# EAGLE board tb-light-001 (EAGLE 7.1.0)
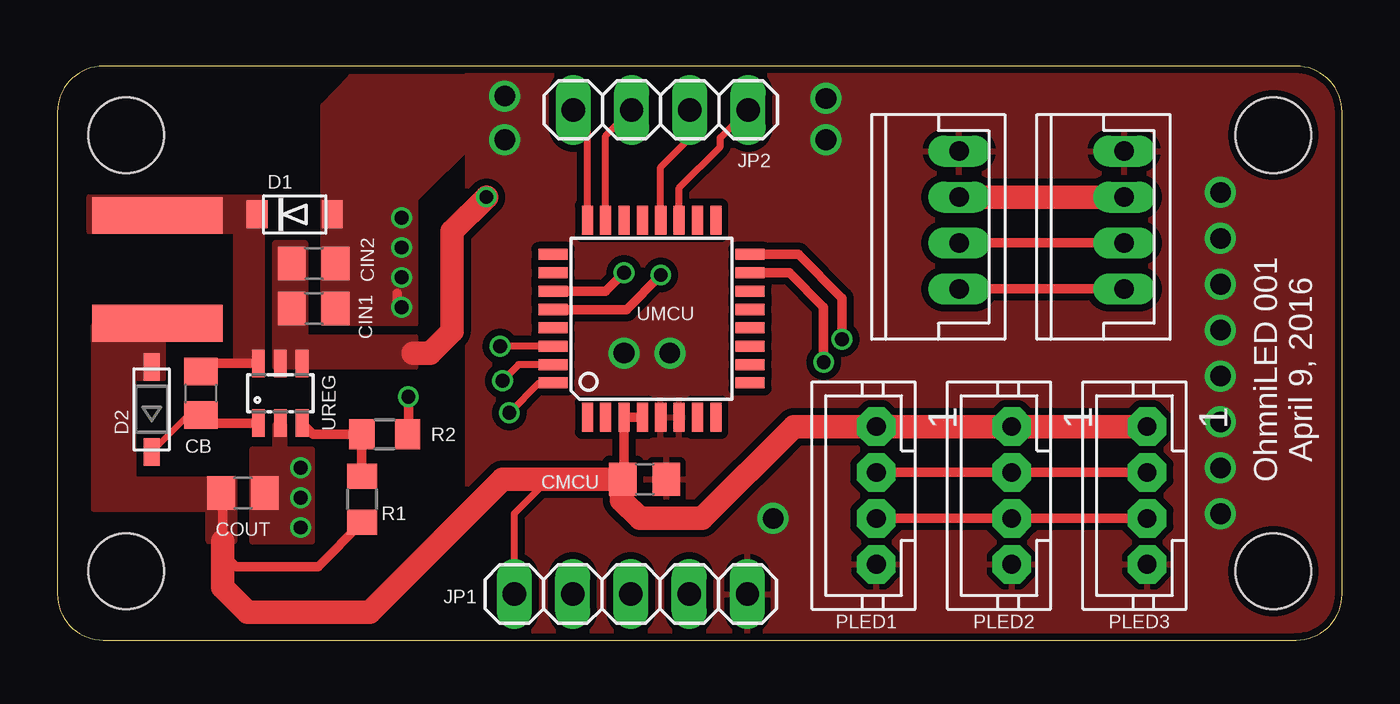
[diagram p0: board, top side]
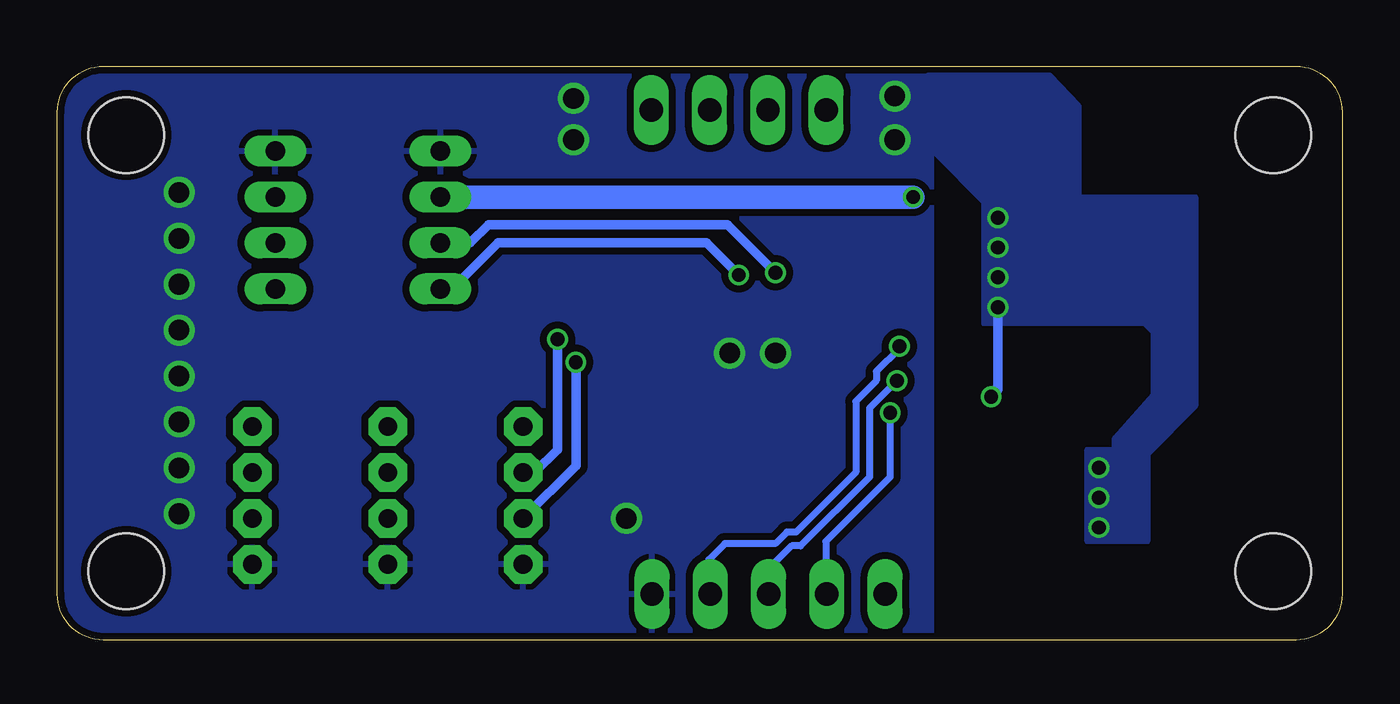
[diagram p1: board, bottom side, seen from below]

Size 56 x 25 mm. Coordinates in mm from the lower left corner, seen from the top.
Outline: 54,25 2,25 arc90 0,23 0,2 arc90 2,0 54,0 arc90 56,2 56,23 arc90 54,25
Copper layers (1*16): Top 0.035mm / dielectric 1.5mm / Bottom 0.035mm
Design rules "dirt_cheap_dirty_boards.v1": minimum track width 5mil, minimum drill 12mil, track to track 5mil, track to pad 5mil, pad to pad 5mil, via to via 5mil, smd to smd 0mil, copper to edge 10mil, drill to drill 10mil, minimum pad ring 10mil, minimum via ring 6mil, stop-mask expansion 2mil, vias tented up to drill 25mil, thermal gap 10mil
Holes 3.3 mm at 3,3 3,22 53,22 53,3

## Footprints (pad centres in the part's own frame; a part is rotated, then mirrored left to right if it is on the bottom)
C0805 = smd 1.2 x 1.45: 1 -0.95,0; 2 0.95,0
SOD-123FL = smd 0.91 x 1.22: A 1.637,0; C -1.637,0
SOD-123 = smd 1.2 x 0.7: A 1.85,0; C -1.85,0
1X05 = drill 1.016 long: 1 -5.08,0; 2 -2.54,0; 3 0,0; 4 2.54,0; 5 5.08,0
1X04 = drill 1.016 long: 1 -3.81,0; 2 -1.27,0; 3 1.27,0; 4 3.81,0
L_NR6028 = smd 1.6 x 5.7: P$1 -2.35,0; P$2 2.35,0
JST-PH4 = drill 0.813 pad 1.676 octagon: 1 3,0; 2 1,0; 3 -1,0; 4 -3,0
R0805 = smd 1.1 x 1.3: 1 -1,0; 2 1,0
TE-AMP-4PIN = drill 0.85 long: 1 -3.3,0.9; 2 -1.3,0.9; 3 0.7,0.9; 4 2.7,0.9
TQFP32-08 = smd 1.27 x 0.483: 1 -4.293,2.8; 2 -4.293,2; 3 -4.293,1.2; 4 -4.293,0.4; 5 -4.293,-0.4; 6 -4.293,-1.2; 7 -4.293,-2; 8 -4.293,-2.8; 17 4.293,-2.8; 18 4.293,-2; 19 4.293,-1.2; 20 4.293,-0.4; 21 4.293,0.4; 22 4.293,1.2; 23 4.293,2; 24 4.293,2.8 | smd 0.483 x 1.27: 9 -2.8,-4.293; 10 -2,-4.293; 11 -1.2,-4.293; 12 -0.4,-4.293; 13 0.4,-4.293; 14 1.2,-4.293; 15 2,-4.293; 16 2.8,-4.293; 25 2.8,4.293; 26 2,4.293; 27 1.2,4.293; 28 0.4,4.293; 29 -0.4,4.293; 30 -1.2,4.293; 31 -2,4.293; 32 -2.8,4.293
SOT23-6 = smd 0.55 x 1.2: 1 -0.95,-1.3; 2 0,-1.3; 3 0.95,-1.3; 4 0.95,1.3; 5 0,1.3; 6 -0.95,1.3

## Placement (x,y rotation side)
CB  10nF  [C0805]  6.26,10.75 90 top
CIN1  10uF  [C0805]  11.18,14.44 0 top
CIN2  10uF  [C0805]  11.18,16.4 0 top
CMCU  10uF  [C0805]  25.6,7 0 top
COUT  22uF  [C0805]  8.09,6.4 0 top
D1  [SOD-123FL]  10.35,18.54 0 top
D2  SMALL-SIGNALSOD-123  [SOD-123]  4.11,10.05 90 top
JP1  [1X05]  25,2 0 top
JP2  [1X04]  26.3,23.1 0 top
L1  4.7uH  [L_NR6028]  4.36,16.15 270 top
PLED1  [JST-PH4]  35.7,6.3 90 top
PLED2  [JST-PH4]  41.6,6.3 90 top
PLED3  [JST-PH4]  47.5,6.3 90 top
R1  49.9k  [R0805]  13.29,6.13 270 top
R2  9.53k  [R0805]  14.27,8.97 180 top
U$1  [LOGO-HORIZ-SMALL]  25.25,12.6 0 bottom
U$3  SERVO-CONNVERT  [TE-AMP-4PIN]  38.4,18 270 top
U$4  SERVO-CONNVERT  [TE-AMP-4PIN]  45.6,18 270 top
UMCU  KE02  [TQFP32-08]  25.9,14 90 top
UREG  AP3211  [SOT23-6]  9.72,10.75 0 top

## Library data of the parts
CB = jared-common-parts; DIGIKEY#: 1276-1015-1-ND
CIN1 CIN2 CMCU = jared-common-parts; DIGIKEY#: 490-5523-1-ND
COUT = jared-common-parts; DIGIKEY#: 490-10511-1-ND
D1 = jared-common-diodes; DIGIKEY#: DB2X41500LCT-ND
D2 = jared-common-diodes; DIGIKEY#: 1N4148W-FDICT-ND
JP1 = pinhead; DIGIKEY#: MANUAL_PLACE
JP2 = pinhead; DIGIKEY#: DNP
L1 = jared-common-parts; DIGIKEY#: 587-2100-1-ND
PLED1-PLED3 = jst-ph; DIGIKEY#: 455-1706-ND
R1 = jared-common-parts; DIGIKEY#: 311-49.9KCRCT-ND
R2 = jared-common-parts; DIGIKEY#: 311-9.53KCRCT-ND
U$1 = jared-common-parts
U$3 U$4 = jared-common-conns; DIGIKEY#: A98779-ND
UMCU = jared-mcu; DIGIKEY#: MKE02Z32VLC4-ND
UREG = jared-common-reg; DIGIKEY#: AP3211KTR-G1DICT-ND

## Nets
5V: CMCU.1 COUT.1 D2.A JP1.1 L1.P$2 PLED1.1 PLED2.1 PLED3.1 R1.2 UMCU.3 UMCU.4
AUX_ADC1: JP2.4 UMCU.19
AUX_ADC2: JP2.3 UMCU.20
AUX_UART_RX: JP2.1 UMCU.24
AUX_UART_TX: JP2.2 UMCU.23
GND: CIN1.2 CIN2.2 CMCU.2 COUT.2 D1.A JP1.5 PLED1.4 PLED2.4 PLED3.4 R2.1 U$3.1 U$4.1 UMCU.5 UMCU.6 UREG.2
LED_CLOCK: PLED1.2 PLED2.2 PLED3.2 UMCU.16
LED_DATA: PLED1.3 PLED2.3 PLED3.3 UMCU.15
N$1: R1.1 R2.2 UREG.3
N$2: CB.2 D1.C L1.P$1 UREG.6
N$3: CB.1 D2.C UREG.1
REG_IN: CIN1.1 CIN2.1 U$3.2 U$4.2 UREG.4 UREG.5
SWD_CLK: JP1.4 UMCU.30
SWD_DIO: JP1.2 UMCU.32
SWD_RESET: JP1.3 UMCU.31
UART_MCU_RX: U$3.4 U$4.4 UMCU.28
UART_MCU_TX: U$3.3 U$4.3 UMCU.27

## Tracks (layer width: path | path; a pad name or v marks a point on that pad's centre or on a via)
5V
  Top 0.305: JP1.1 19.92,5.52 21.4,7
  Top 0.406: R1.2 11.36,3.2 7.8,3.2 7.2,3.8 7.2,4.3 7.2,6.34 COUT.1 | CMCU.1 24.7,7.45 UMCU.3 UMCU.4
  Top 1.016: PLED3.1 PLED2.1 PLED1.1 32.1,9.3 28.1,5.3 25.4,5.3 24.6,6.1 24.6,6.95 CMCU.1 21.4,7 19.4,7 13.6,1.2 8.3,1.2 7.2,2.3 7.2,4.3
  pour Top (no thermals): 4.6,13.7 4.6,11.4 3.3,11.4 3.3,7 7.7,7 7.7,4.3 6.6,4.3 6.6,5.7 1.6,5.7 1.6,13.7
AUX_ADC1
  Top 0.305: UMCU.19 27.1,19.7 28.9,21.5 28.9,21.89 JP2.4
AUX_ADC2
  Top 0.305: UMCU.20 26.3,20.6 27.6,21.9 27.6,23.07 JP2.3
AUX_UART_RX
  Top 0.305: UMCU.24 23.1,22.49 JP2.1
AUX_UART_TX
  Top 0.305: UMCU.23 23.9,21.97 JP2.2
GND  (via drill 0.6, 0.9)
  Top 0.406: R2.1 15.3,9 v15.3,10.6 | v15,14.5 14.8,14.7 14.8,15.1
  Bottom 0.406: v15.3,10.6 15,10.9 v15,14.5
  other vias: 15,15.8 15,17.1 10.6,4.9 10.6,6.2 10.6,7.5 15,18.4 33.5,23.6 33.5,21.8 19.5,23.7 19.5,21.8 50.7,19.5 50.7,17.5 50.7,15.5 50.7,13.5 50.7,11.5 50.7,9.5 50.7,7.5 50.7,5.5 26.7,12.5 24.7,12.5 31.2,5.3
  pour Top (no thermals): 15.6,13.8 11.6,13.8 11.6,19.3 15.6,19.3
  pour Bottom (no thermals): 15.6,13.8 15.6,19.3 6.4,19.3 6.4,10.2 8.5,8.1 8.5,4.3 11.1,4.3 11.1,8.3 9.9,8.3 9.9,8.8 8.2,10.7 8.2,13.4 8.6,13.8
  pour Top (no thermals): 11.1,4.3 11.1,8.3 9.9,8.3 9.9,9.4 9.5,9.4 9.5,8.3 8.5,8.3 8.5,4.3
  pour Top (isolate 0.305): 17.9,26.7 56.7,26.7 56.7,-1.1 17.9,-1.1
  pour Bottom (isolate 0.305): 17.9,27.8 56.9,27.9 56.9,-3 17.9,-3.1
  pour Top (no thermals): 11.6,19.2 11.6,23.3 12.8,24.55 18.2,24.55 18.2,21.8 15.6,19.2
  pour Bottom (no thermals): 11.5,23.3 11.5,18.8 15.3,18.8 18,21.5 18.05,24.6 12.75,24.6
LED_CLOCK  (via drill 0.6)
  Top 0.406: PLED3.2 PLED2.2 PLED1.2 | v34.2,13.1 34.2,14.9 32.3,16.8 UMCU.16
  Bottom 0.406: PLED1.2 35.2,7.3 34.2,8.3 v34.2,13.1
LED_DATA  (via drill 0.6)
  Top 0.406: PLED1.3 PLED2.3 PLED3.3 | v33.4,12.1 33.4,14.5 31.9,16 UMCU.15
  Bottom 0.406: PLED1.3 33.4,7.6 v33.4,12.1
N$1
  Top 0.406: R1.1 13.27,7.55 R2.2 11.15,8.97 UREG.3
N$2
  Top 0.406: UREG.6 6.26,12.05 CB.2
  pour Top (no thermals): 1.4,19.3 8.9,19.3 8.9,12 7.8,12 7.8,17.8 1.4,17.8
N$3
  Top 0.254: D2.C 5.71,9.8 CB.1
  Top 0.406: CB.1 6.61,9.45 UREG.1
REG_IN  (via drill 0.6)
  Top 1.016: U$4.2 U$3.2 | v18.7,19.3 17.2,17.8 17.2,13.45 16.25,12.5 15.5,12.5
  Bottom 1.016: U$3.2 v18.7,19.3
  pour Top (no thermals): 9.5,17.3 10.8,17.3 10.8,13.2 15.6,13.2 15.6,11.9 9.5,11.9
SWD_CLK  (via drill 0.6)
  Top 0.305: UMCU.30 v19.3,12.8
  Bottom 0.305: v19.3,12.8 19.3,12.7 20.3,11.7 20.3,11.3 21.2,10.4 21.2,7.3 23.8,4.7 24.2,4.7 24.7,4.2 26.9,4.2 27.6,3.5 27.6,2.06 JP1.4
SWD_DIO  (via drill 0.6)
  Top 0.305: UMCU.32 21,11.2 v19.7,9.9
  Bottom 0.305: v19.7,9.9 19.7,7.1 22.5,4.3 22.5,2.04 JP1.2
SWD_RESET  (via drill 0.6)
  Top 0.305: UMCU.31 20.1,12 v19.4,11.3
  Bottom 0.305: v19.4,11.3 20.6,10.1 20.6,7.1 23.6,4.1 24,4.1 25,3.1 JP1.3
UART_MCU_RX  (via drill 0.6)
  Top 0.406: U$4.4 U$3.4 | v26.3,15.9 24.8,14.4 UMCU.28
  Bottom 0.406: U$3.4 38.8,15.3 36.8,17.3 27.7,17.3 v26.3,15.9
UART_MCU_TX  (via drill 0.6)
  Top 0.406: U$4.3 U$3.3 | v24.7,16 23.9,15.2 UMCU.27
  Bottom 0.406: U$3.3 38,17.3 37.2,18.1 26.8,18.1 v24.7,16

## Text on the board
tNames: OhmniLED 001 / April 9, 2016